# EAGLE board 1_smd_version (EAGLE 5.06)
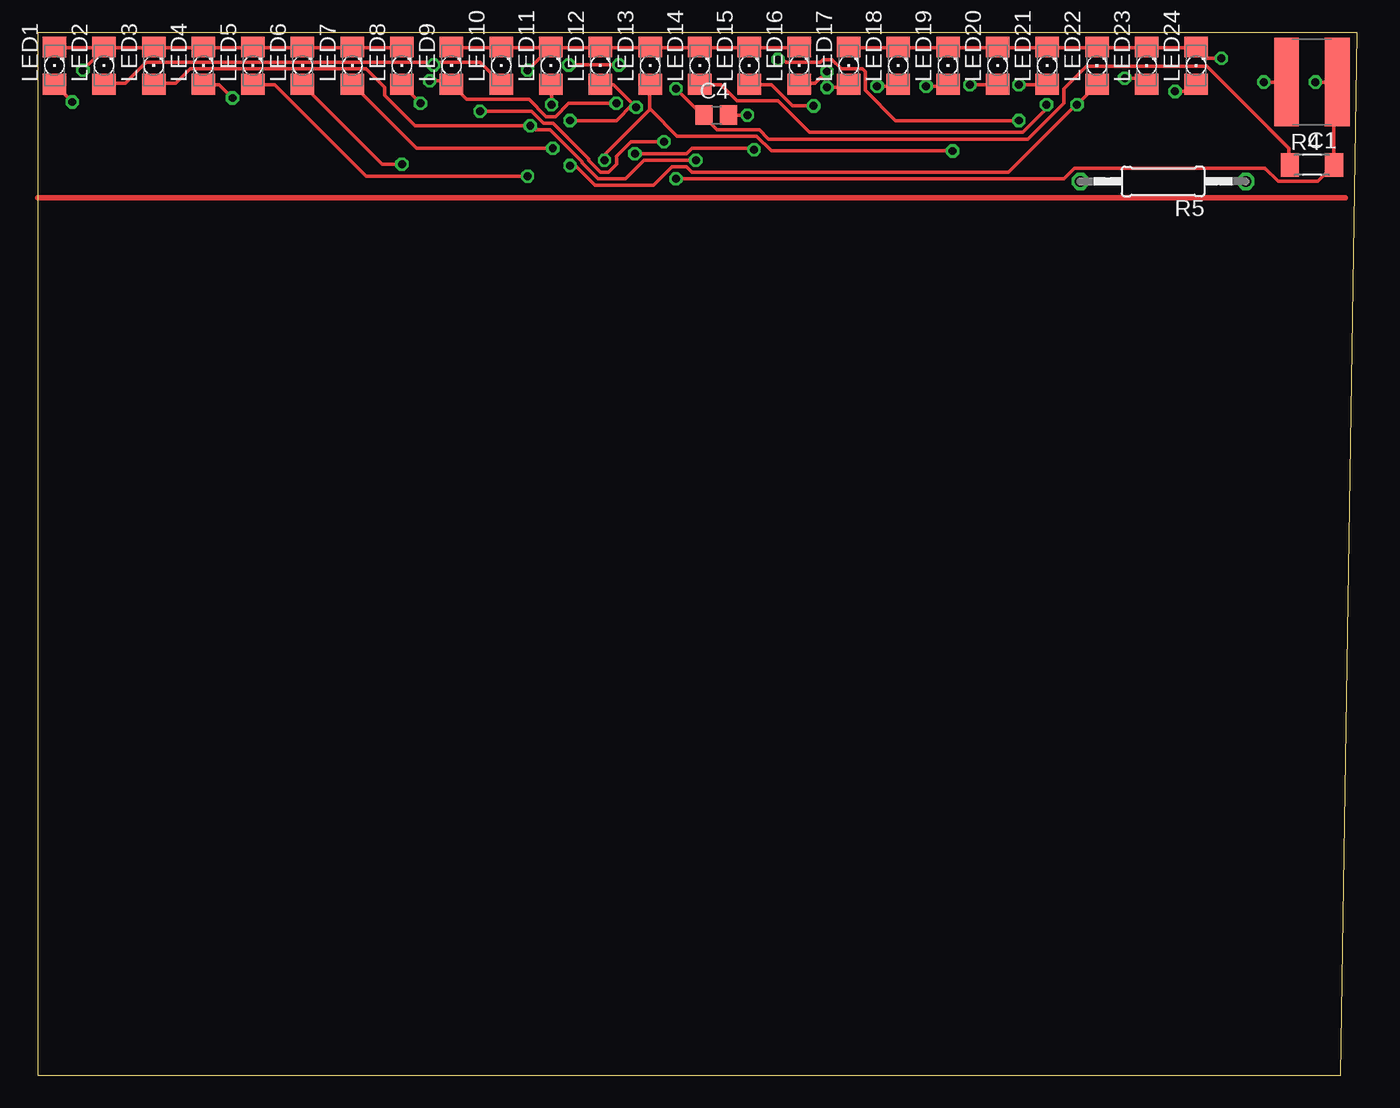
[diagram p0: board, top side]
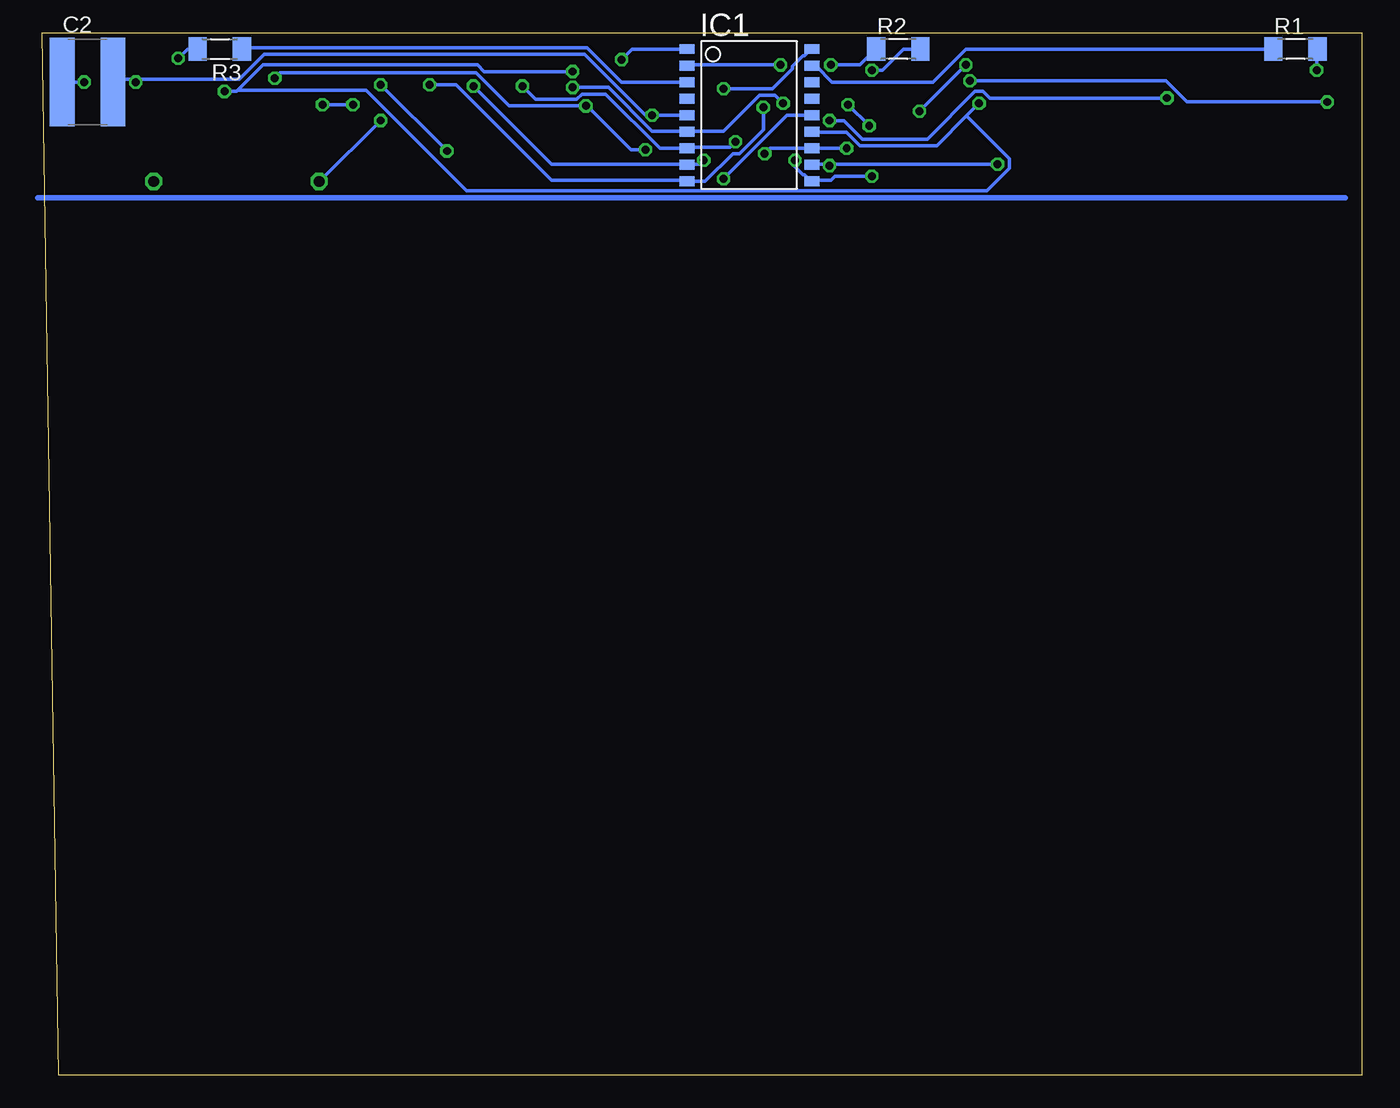
[diagram p1: board, bottom side, seen from below]

Size 101.27 x 80 mm. Coordinates in mm from the lower left corner, seen from the top.
Outline: 0,0 100,0 101.27,80 0,80 0,0
Copper layers (1*16): Top 0.035mm / dielectric 1.5mm / Bottom 0.035mm
Design rules "default": minimum track width 10mil, minimum drill 24mil, track to track 8mil, track to pad 8mil, pad to pad 8mil, via to via 8mil, smd to smd 8mil, copper to edge 40mil, drill to drill 8mil, minimum pad ring 10mil, minimum via ring 8mil, stop-mask expansion 4mil, vias tented up to drill 0mil, thermal gap 10mil

## Footprints (pad centres in the part's own frame; a part is rotated, then mirrored left to right if it is on the bottom)
C1825 = smd 1.9 x 6.8: 1 -1.95,0; 2 1.95,0
C0805 = smd 1.3 x 1.5: 1 -0.95,0; 2 0.95,0
SO-18W = smd 0.762 x 1.143: 1 -5.08,-4.788; 2 -3.81,-4.788; 3 -2.54,-4.788; 4 -1.27,-4.788; 5 0,-4.788; 6 1.27,-4.788; 7 2.54,-4.788; 8 3.81,-4.788; 9 5.08,-4.788; 10 5.08,4.788; 11 3.81,4.788; 12 2.54,4.788; 13 1.27,4.788; 14 0,4.788; 15 -1.27,4.788; 16 -2.54,4.788; 17 -3.81,4.788; 18 -5.08,4.788
1206 = smd 1.6 x 1.803: A -1.422,0; C 1.422,0
M1406 = smd 1.4 x 1.8: 1 -1.7,0; 2 1.7,0
0207/12 = drill 0.813 octagon: 1 -6.35,0; 2 6.35,0

## Placement (x,y rotation side)
C1  [C1825]  97.79,76.2 180 top
C2  [C1825]  97.79,76.2 0 bottom
C4  [C0805]  52.07,73.66 0 top
IC1  PIC16F627SO  [SO-18W]  46.99,73.66 270 bottom
LED1  [1206]  1.27,77.47 90 top
LED2  [1206]  5.08,77.47 90 top
LED3  [1206]  8.89,77.47 90 top
LED4  [1206]  12.7,77.47 90 top
LED5  [1206]  16.51,77.47 90 top
LED6  [1206]  20.32,77.47 90 top
LED7  [1206]  24.13,77.47 90 top
LED8  [1206]  27.94,77.47 90 top
LED9  [1206]  31.75,77.47 90 top
LED10  [1206]  35.56,77.47 90 top
LED11  [1206]  39.37,77.47 90 top
LED12  [1206]  43.18,77.47 90 top
LED13  [1206]  46.99,77.47 90 top
LED14  [1206]  50.8,77.47 90 top
LED15  [1206]  54.61,77.47 90 top
LED16  [1206]  58.42,77.47 90 top
LED17  [1206]  62.23,77.47 90 top
LED18  [1206]  66.04,77.47 90 top
LED19  [1206]  69.85,77.47 90 top
LED20  [1206]  73.66,77.47 90 top
LED21  [1206]  77.47,77.47 90 top
LED22  [1206]  81.28,77.47 90 top
LED23  [1206]  85.09,77.47 90 top
LED24  [1206]  88.9,77.47 90 top
R1  [M1406]  5.08,78.74 0 bottom
R2  [M1406]  35.56,78.74 0 bottom
R3  [M1406]  87.63,78.74 180 bottom
R4  [M1406]  97.79,69.85 0 top
R5  [0207/12]  86.36,68.58 180 top

## Library data of the parts
C1 C2 C4 R5 = rcl
IC1 = microchip
LED1-LED24 = led
R1-R4 = resistor

## Nets
N$1: LED1.C LED2.C LED3.C LED4.C LED5.C LED6.C LED7.C LED8.C R1.2
N$2: LED9.C LED10.C LED11.C LED12.C LED13.C LED14.C LED15.C LED16.C R2.2
N$3: LED17.C LED18.C LED19.C LED20.C LED21.C LED22.C LED23.C LED24.C R3.2
N$4: IC1.17 R1.1
N$5: IC1.2 R2.1
N$6: IC1.3 R3.1
N$7: IC1.6 LED1.A LED9.A LED17.A
N$8: IC1.7 LED2.A LED10.A LED18.A
N$9: IC1.8 LED3.A LED11.A LED19.A
N$10: IC1.9 LED4.A LED12.A LED20.A
N$11: IC1.10 LED5.A LED13.A LED21.A
N$12: IC1.11 LED6.A LED14.A LED22.A
N$13: IC1.12 LED7.A LED15.A LED23.A
N$14: IC1.13 LED8.A LED16.A LED24.A
N$19: C1.1 C2.1 IC1.14 R4.2
N$20: C1.2 C2.2 C4.2 IC1.5
N$21: C4.1 IC1.18 R4.1
N$24: IC1.1 R5.2
N$25: R5.1

## Tracks (layer width: path | path; a pad name or v marks a point on that pad's centre or on a via)
N$1  (via drill 0.61)
  Top 0.254: v3.45,77.11 5.08,78.74 LED2.C | LED1.C 1.32,78.84 4.98,78.84 LED2.C | LED2.C 5.18,78.84 8.84,78.84 LED3.C 8.94,78.84 12.7,78.84 LED4.C 12.8,78.84 16.46,78.84 LED5.C 16.56,78.84 20.32,78.84 LED6.C 20.42,78.84 24.08,78.84 LED7.C 24.18,78.84 27.94,78.84 LED8.C
  Bottom 0.254: v3.45,77.11 3.45,78.74 R1.2
N$2  (via drill 0.61)
  Top 0.254: LED9.C 31.8,78.84 35.56,78.84 LED10.C 35.66,78.84 39.22,78.84 LED11.C | v37.59,77.11 39.32,78.84 LED11.C | LED11.C 39.42,78.84 43.18,78.84 LED12.C 43.28,78.84 46.94,78.84 LED13.C 47.04,78.84 50.8,78.84 LED14.C 50.9,78.84 54.56,78.84 LED15.C 54.66,78.84 58.42,78.84 LED16.C
  Bottom 0.254: v37.59,77.11 36.78,77.11 35.15,78.74 R2.2
N$3  (via drill 0.61)
  Top 0.254: v90.83,78.03 89.71,78.03 88.9,78.84 LED24.C 88.8,78.84 85.14,78.84 LED23.C 85.04,78.84 81.38,78.84 LED22.C 81.28,78.84 77.52,78.84 LED21.C 77.42,78.84 73.76,78.84 LED20.C 73.66,78.84 69.9,78.84 LED19.C 69.8,78.84 66.14,78.84 LED18.C 66.04,78.84 62.28,78.84 LED17.C
  Bottom 0.254: v90.83,78.03 90.12,78.74 R3.2
N$4
  Bottom 0.254: IC1.17 42.16,77.42 41.86,77.42 40.64,76.2 32.92,76.2 30.38,78.74 R1.1
N$5  (via drill 0.61)
  Top 0.254: v40.74,77.52 v44.6,77.52
  Bottom 0.254: v44.6,77.52 51.71,77.52 IC1.2 | v40.74,77.52 38.51,77.52 37.29,78.74 R2.1
N$6
  Bottom 0.254: IC1.3 56.79,76.2 59.44,78.84 85.75,78.84 85.85,78.74 R3.1
N$7  (via drill 0.61)
  Top 0.254: v60.55,75.79 61.98,75.79 62.18,76 LED17.A | v2.64,74.68 1.32,76 LED1.A | v30.07,76.3 31.5,76.3 31.7,76.1 LED9.A 31.8,76 32.92,74.88 37.69,74.88 39.01,73.56 39.73,73.56 40.74,74.57 v44.4,74.57
  Bottom 0.254: v60.55,75.79 57.81,75.79 54.46,72.44 51.82,72.44 IC1.6 51.71,72.44 48.97,72.44 46.23,75.18 45.01,75.18 v44.4,74.57 | v2.64,74.68 13.41,74.68 15.04,76.3 v30.07,76.3
N$8  (via drill 0.61)
  Top 0.254: v64.41,75.89 65.94,75.89 66.04,76 LED18.A | 30.38,77.72 33.93,77.72 35.56,76.1 LED10.A | 30.38,77.72 8.33,77.72 6.71,76.1 5.08,76.1 LED2.A | v48.06,71.63 45.52,71.63 44.4,70.51 44.4,69.9 43.79,69.29 43.18,69.29 42.27,70.21 42.27,70.31 39.52,73.05 38.81,73.05 37.9,73.97 v33.93,73.97 | 30.38,77.72 v30.38,77.52
  Bottom 0.254: v64.41,75.89 63.4,74.88 60.25,74.88 59.84,75.29 58.01,75.29 53.85,71.12 IC1.7 51.71,71.22 48.46,71.22 v48.06,71.63 | v30.38,77.52 v33.93,73.97
N$9  (via drill 0.61)
  Top 0.254: v68.17,75.89 69.7,75.89 69.8,76 LED19.A | v39.42,74.47 39.42,76 LED11.A | LED3.A 8.94,76.1 10.57,76.1 11.68,77.22 25.2,77.22 26.62,75.79 26.62,75.18 28.96,72.85 v37.8,72.85 37.9,72.85 38.2,72.54 39.32,72.54 41.76,70.1 41.76,70 42.98,68.78 45.11,68.78 46.53,70.21 v50.49,70.21
  Bottom 0.254: v68.17,75.89 62.18,69.9 51.82,69.9 IC1.8 51.71,69.9 50.8,69.9 v50.49,70.21 | v37.8,72.85 v39.42,74.47
N$10  (via drill 0.61)
  Top 0.254: LED12.A 43.18,76 44.2,76 v45.92,74.27 45.62,74.47 44.4,73.25 v40.84,73.25 | v14.94,74.98 13.92,76 12.7,76 LED4.A | v71.53,76 73.66,76 LED20.A
  Bottom 0.254: v45.92,74.27 45.92,72.54 47.75,70.71 48.26,70.71 50.39,68.58 IC1.9 51.82,68.68 62.18,68.68 69.49,76 v71.53,76 | v14.94,74.98 28.55,74.98 29.06,75.49 29.67,75.49 33.33,71.83 38.3,71.83 39.73,73.25 v40.84,73.25
N$11  (via drill 0.61)
  Top 0.254: v43.48,70.21 43.48,70.61 46.94,74.07 | 46.94,74.07 46.94,76 LED13.A | v37.59,68.99 25.2,68.99 18.19,76 16.56,76 LED5.A | v75.29,76 77.42,76 LED21.A | v70.21,70.92 56.29,70.92 55.17,72.03 49.07,72.03 47.04,74.07 46.94,74.07
  Bottom 0.254: v43.48,70.21 43.48,69.7 42.88,69.09 42.77,69.09 42.27,68.58 IC1.10 42.16,68.68 40.74,68.68 40.44,68.99 v37.59,68.99 | v70.21,70.92 v75.29,76
N$12  (via drill 0.61)
  Top 0.254: v27.94,69.9 26.42,69.9 20.32,76 LED6.A | v77.42,74.47 77.42,74.17 75.59,72.34 59.23,72.34 56.79,74.78 53.65,74.78 52.43,76 50.8,76 LED14.A | LED22.A 81.28,76 v79.76,74.47 79.65,74.47 74.47,69.29 50.19,69.29 49.78,69.7 48.67,69.7 47.24,68.28 42.77,68.28 41.25,69.8 v40.84,69.8
  Bottom 0.254: v27.94,69.9 40.84,69.9 | 40.84,69.9 42.16,69.9 IC1.11 | v79.76,74.47 v77.42,74.47 | 40.84,69.9 v40.84,69.8
N$13  (via drill 0.61)
  Top 0.254: v39.52,71.12 29.06,71.12 24.18,76 LED7.A | v59.54,74.37 57.91,74.37 56.29,76 54.66,76 LED15.A | v83.41,76.5 84.63,76.5 85.04,76.1 LED23.A | v45.82,70.71 49.78,70.71 50.19,71.12 54.86,71.12 v54.97,71.02
  Bottom 0.254: v39.52,71.12 IC1.12 45.41,71.12 v45.82,70.71 | v83.41,76.5 83.01,76.91 67.97,76.91 65.43,74.37 v59.54,74.37 59.44,74.37 56.08,71.02 v54.97,71.02
N$14  (via drill 0.61)
  Top 0.254: v29.36,74.57 27.94,76 LED8.A | v60.55,77.01 59.64,76.1 58.42,76.1 LED16.A | v87.27,75.49 88.39,75.49 88.9,76 LED24.A
  Bottom 0.254: 30.33,73.61 v29.36,74.57 | 30.33,73.61 32.61,71.32 38.51,71.32 39.52,72.34 42.16,72.34 IC1.13 | v60.55,77.01 67.36,77.01 67.87,77.52 84.33,77.52 86.21,75.64 | 86.21,75.64 86.36,75.49 v87.27,75.49 | 30.33,73.61 27.03,70.31 27.03,69.6 28.75,67.87 68.68,67.87 76.4,75.59 86.16,75.59 86.21,75.64
N$17
  Bottom 0.406: 1.27,67.31 101.6,67.31
N$18
  Top 0.406: 0,67.31 100.33,67.31
N$19  (via drill 0.61)
  Top 0.254: v98.04,76.2 C2.1 99.47,76.1 99.47,69.9 R4.2 99.47,69.8 98.25,68.58 95.2,68.58 94.18,69.6 79.55,69.6 78.74,68.78 v48.97,68.78
  Bottom 0.254: v98.04,76.2 C2.1 | v48.97,68.78 44.09,73.66 IC1.14
N$20  (via drill 0.61)
  Top 0.254: C4.2 v54.46,73.66 | v94.08,76.2 C1.2
  Bottom 0.254: IC1.5 v54.46,73.66 54.97,73.66 59.64,78.33 84.23,78.33 86.16,76.4 94.08,76.4 | 94.08,76.4 95.61,76.4 95.81,76.2 C1.2 | 94.08,76.4 v94.08,76.2
N$21  (via drill 0.61)
  Top 0.254: v48.97,75.69 51,73.66 C4.1 51.1,73.56 52.12,72.54 55.37,72.54 56.08,71.83 76,71.83 78.74,74.57 78.74,75.69 80.47,77.42 89.71,77.42 96.01,71.12 96.01,69.9 R4.1
  Bottom 0.254: v48.97,75.69 45.21,75.69 43.69,77.22 43.69,77.42 42.88,78.23 42.77,78.23 42.27,78.74 IC1.18
N$24  (via drill 0.61)
  Top 0.254: v56.79,77.93 57.2,77.93 57.4,77.72 60.05,77.72 60.25,77.93 60.96,77.93 61.67,77.22 63.3,77.22 63.5,77.01 63.5,75.59 65.84,73.25 v75.29,73.25
  Bottom 0.254: v56.79,77.93 55.98,78.74 IC1.1 | v75.29,73.25 79.96,68.58 R5.2